# Altium PCB Backplane.PcbDoc (part 1 of 3)
Units mil, origin at the board's own origin, x right, y up, seen from the top; angles counter-clockwise.
Board outline 10300 x 6600 mil, 2 copper layers (Top Layer, Bottom Layer), stack 61.756 mil thick; 53 components, 149 nets, 1204 pads, 195 vias.
Unrouted connection lines stored in the file: 4.
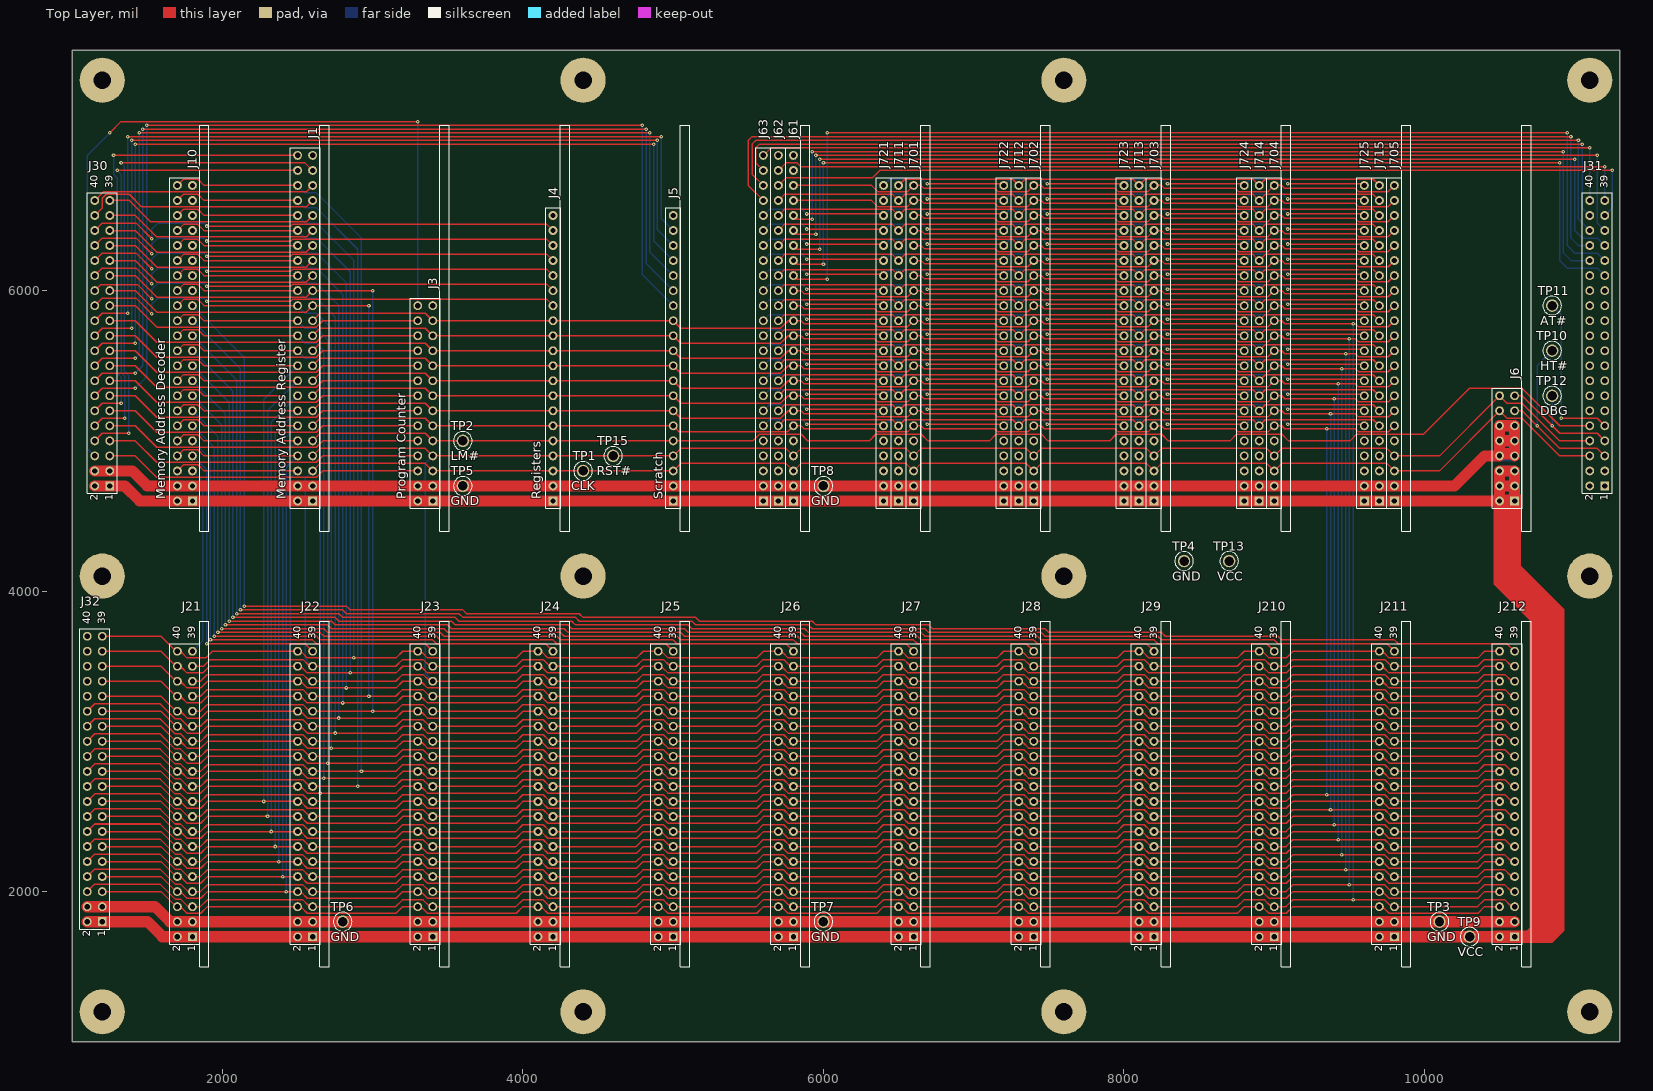
[diagram p0: Top Layer view]
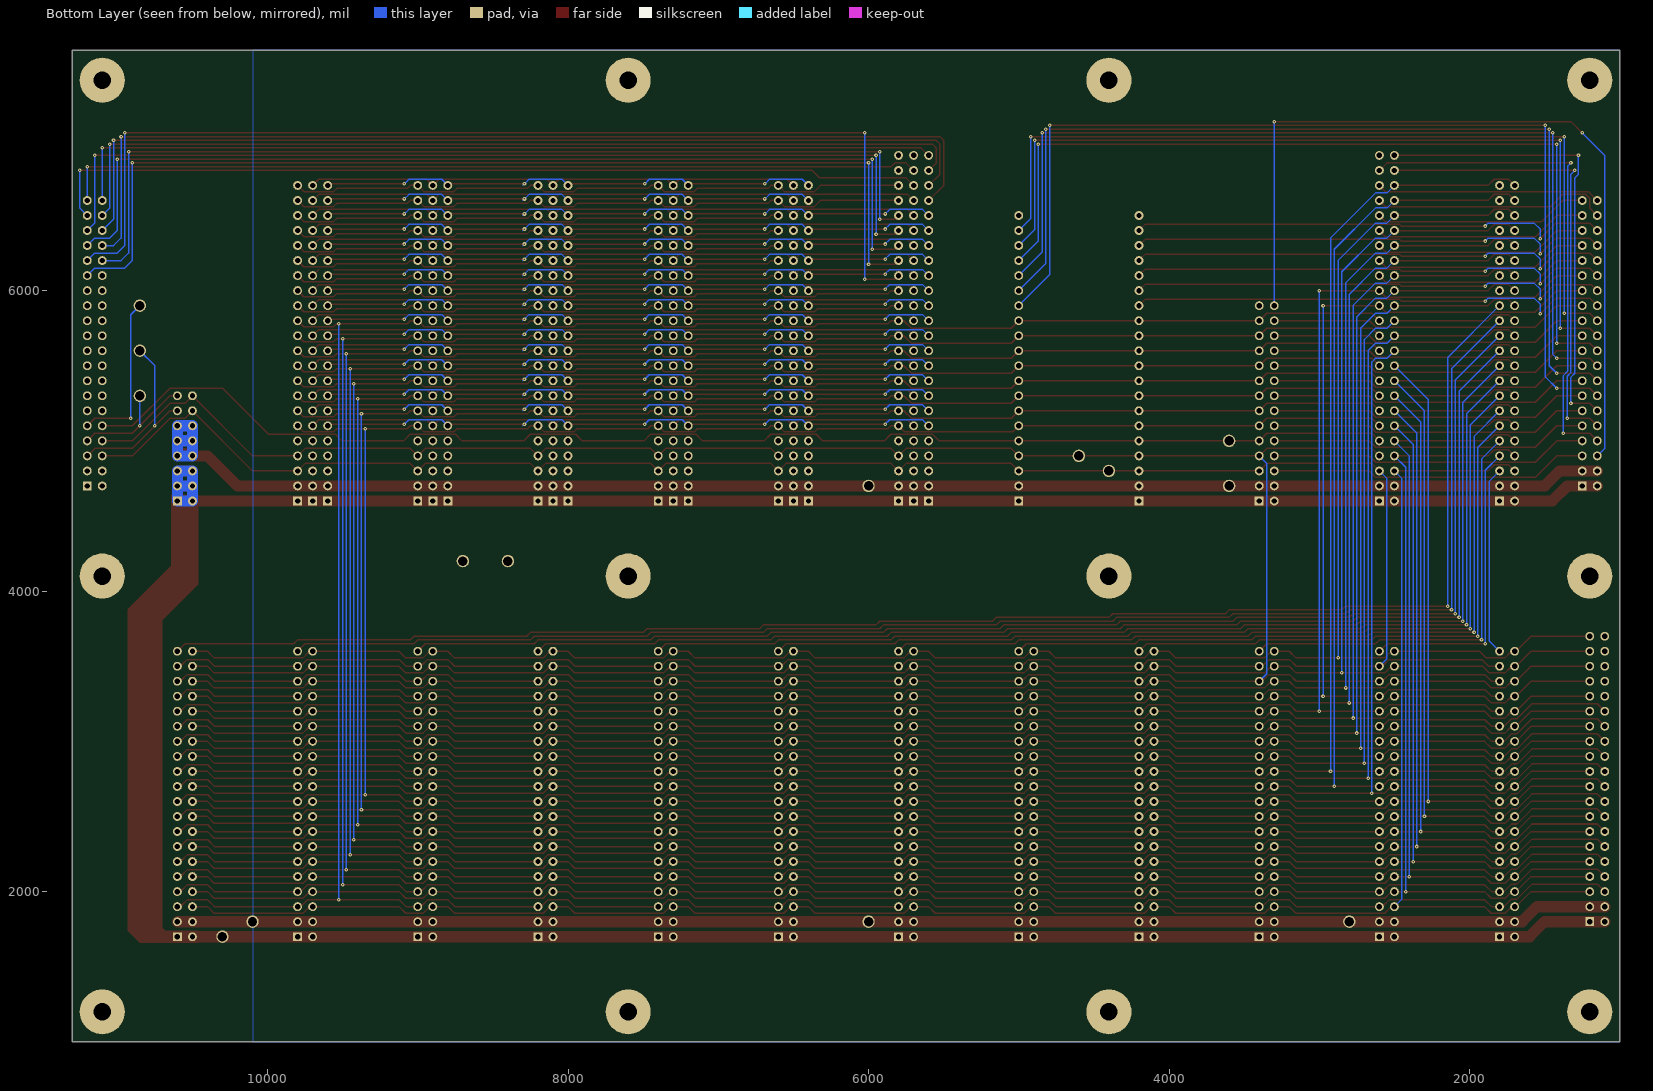
[diagram p1: Bottom Layer view, seen from below]

## Layer stack, top to bottom
Top Solder: solder mask 1, SM-001, Dk 4
Top Layer: signal copper 1.378
Dielectric 1: core 59, Core-043, Dk 4.3
Bottom Layer: signal copper 1.378
Bottom Solder: solder mask 1, SM-001, Dk 4

## Board outline
1000,1000 11300,1000 11300,7600 1000,7600

## Design rules (kind name [scope] priority, off if disabled: settings)
BoardOutlineClearance [All] p1: gap=20 ignorepadtopadclearanceinfootprint=FALSE except(50: Poly-OutlineEdge Poly-CavityEdge Poly-CutoutEdge Poly-SplitBarrior Poly-SplitContinuation)
Clearance Clearance_Poly [InPoly] p1: gap=20 ignorepadtopadclearanceinfootprint=FALSE
Clearance [All] p2: gap=6 ignorepadtopadclearanceinfootprint=FALSE
PolygonConnect [All] p1: connectstyle=Relief reliefconductorwidth=20 reliefentries=4 polygonreliefangle="90 Angle" airgapwidth=20
RoutingVias [All] p1: holewidth=28 width=50 viastyle="Through Hole" minholewidth=10 minwidth=24 maxholewidth=28 maxwidth=50
SolderMaskExpansion [All] p1: expansion=4 istentingtop=FALSE
Width [All] p1: maxlimit=100 minlimit=10 preferedwidth=10
30 further rules are at their usual default settings.

## Classes and differential pairs
component class PWR_CLK: J6
net class ALU_RFU[0..66]: ALU_RFU0 ALU_RFU1 ALU_RFU2 ALU_RFU3 ALU_RFU4 ALU_RFU5 ALU_RFU6 ALU_RFU7 ALU_RFU8 ALU_RFU9 ALU_RFU10 ALU_RFU11 ALU_RFU12 ALU_RFU13 ALU_RFU14 ALU_RFU15 ALU_RFU16 ALU_RFU17 ALU_RFU18 ALU_RFU19 ALU_RFU20 ALU_RFU21 ALU_RFU22 ALU_RFU23 ALU_RFU24 ALU_RFU25 ALU_RFU26 ALU_RFU27 ALU_RFU28 ALU_RFU29 ALU_RFU30 ALU_RFU31 ALU_RFU32 ALU_RFU33 ALU_RFU34 ALU_RFU35 ALU_RFU36 ALU_RFU37 ALU_RFU38 ALU_RFU39 ALU_RFU40 ALU_RFU41 ALU_RFU42 ALU_RFU43 ALU_RFU44 ALU_RFU45 ALU_RFU46 ALU_RFU47 ALU_RFU48 ALU_RFU49 ALU_RFU50 ALU_RFU51 ALU_RFU52 ALU_RFU53 ALU_RFU54 ALU_RFU55 ALU_RFU56 ALU_RFU57 ALU_RFU58 ALU_RFU59 ALU_RFU60 ALU_RFU61 ALU_RFU62 ALU_RFU63 ALU_RFU64 ALU_RFU65 ALU_RFU66
component class ALU5: J705 J715 J725
net class Y[0..7]: Y0 Y1 Y2 Y3 Y4 Y5 Y6 Y7
net class X[0..7]: X0 X1 X2 X3 X4 X5 X6 X7
net class M\[1..15]: M\1 M\2 M\3 M\4 M\5 M\6 M\7 M\8 M\9 M\10 M\11 M\12 M\13 M\14 M\15
component class ALU_CTRL: J61 J62 J63
component class Backplane: TP1 TP2 TP3 TP4 TP5 TP6 TP7 TP8 TP9 TP10 TP11 TP12 TP13 TP15
component class CTRL: J30 J31 J32
component class ALU4: J704 J714 J724
net class INST[0..7]: INST0 INST1 INST2 INST3 INST4 INST5 INST6 INST7
net class EN[1..20]: EN1 EN2 EN3 EN4 EN5 EN6 EN7 EN8 EN9 EN10 EN11 EN12 EN13 EN14 EN15 EN16 EN17 EN18 EN19 EN20
net class BUS[0..7]: BUS0 BUS1 BUS2 BUS3 BUS4 BUS5 BUS6 BUS7
net class ALU[0..3]: ALU0 ALU1 ALU2 ALU3
net class ADDR[0..19]: ADDR0 ADDR1 ADDR2 ADDR3 ADDR4 ADDR5 ADDR6 ADDR7 ADDR8 ADDR9 ADDR10 ADDR11 ADDR12 ADDR13 ADDR14 ADDR15 ADDR16 ADDR17 ADDR18 ADDR19
component class SCRATCH: J5
component class REGS: J4
component class M12: J212
channel class Memory: M0 M1 M2 M3 M4 M5 M6 M7 M8 M9 M10 M11
component class M8: J28
component class M7: J27
component class MAR: J10
channel class "ALU Connector": ALU1 ALU2 ALU3 ALU4 ALU5
component class ALU3: J703 J713 J723 P?_ALU3
component class ALU2: J702 J712 J722 P?_ALU2
component class ALU1: J701 J711 J721 P?_ALU1
component class PC: J3
component class M11: J211
component class M10: J210
component class M9: J29
component class M6: J26
component class M5: J25
component class M4: J24
component class M3: J23
component class M2: J22
component class M1: J21

## Components (designator, comment, footprint, x,y, rotation, side; value= is the part's Value field where it differs from the comment)
J1 "Memory Address Register" HDR2X24 2600,4600 r90 top
J3 "Program Counter" HDR2X14 3400,4600 r90 top
J4 "Registers" HDR1X20 4200,4600 r90 top
J5 "Scratch" HDR1X20 5000,4600 r90 top
J6 "Header 8X2" HDR2X8 10600,4600 r90 top
J10 "Memory Address Decoder" HDR2X22 1800,4600 r90 top
J21 "Header 20X2" HDR2X20 1800,1700 r90 top (schematic designator J2)
J22 "Header 20X2" HDR2X20 2600,1700 r90 top (schematic designator J2)
J23 "Header 20X2" HDR2X20 3400,1700 r90 top (schematic designator J2)
J24 "Header 20X2" HDR2X20 4200,1700 r90 top (schematic designator J2)
J25 "Header 20X2" HDR2X20 5000,1700 r90 top (schematic designator J2)
J26 "Header 20X2" HDR2X20 5800,1700 r90 top (schematic designator J2)
J27 "Header 20X2" HDR2X20 6600,1700 r90 top (schematic designator J2)
J28 "Header 20X2" HDR2X20 7400,1700 r90 top (schematic designator J2)
J29 "Header 20X2" HDR2X20 8200,1700 r90 top (schematic designator J2)
J30 "Header 20X2" HDR2X20 1250,4700 r90 top
J31 "Header 20X2" HDR2X20 11200,4700 r90 top
J32 "Header 20X2" HDR2X20 1200,1800 r90 top
J61 "Header 24" HDR1X24 5800,4600 r90 top
J62 "Header 24" HDR1X24 5700,4600 r90 top
J63 "Header 24" HDR1X24 5600,4600 r90 top
J210 "Header 20X2" HDR2X20 9000,1700 r90 top (schematic designator J2)
J211 "Header 20X2" HDR2X20 9800,1700 r90 top (schematic designator J2)
J212 "Header 20X2" HDR2X20 10600,1700 r90 top (schematic designator J2)
J701 "Header 22" HDR1X22 6600,4600 r90 top (schematic designator J70)
J702 "Header 22" HDR1X22 7400,4600 r90 top (schematic designator J70)
J703 "Header 22" HDR1X22 8200,4600 r90 top (schematic designator J70)
J704 "Header 22" HDR1X22 9000,4600 r90 top locked (schematic designator J70)
J705 "Header 22" HDR1X22 9800,4600 r90 top (schematic designator J70)
J711 "Header 22" HDR1X22 6500,4600 r90 top (schematic designator J71)
J712 "Header 22" HDR1X22 7300,4600 r90 top (schematic designator J71)
J713 "Header 22" HDR1X22 8100,4600 r90 top (schematic designator J71)
J714 "Header 22" HDR1X22 8900,4600 r90 top locked (schematic designator J71)
J715 "Header 22" HDR1X22 9700,4600 r90 top (schematic designator J71)
J721 "Header 22" HDR1X22 6400,4600 r90 top (schematic designator J72)
J722 "Header 22" HDR1X22 7200,4600 r90 top (schematic designator J72)
J723 "Header 22" HDR1X22 8000,4600 r90 top (schematic designator J72)
J724 "Header 22" HDR1X22 8800,4600 r90 top locked (schematic designator J72)
J725 "Header 22" HDR1X22 9600,4600 r90 top (schematic designator J72)
TP1 "CLK" KSTN-5011_V 4400,4800 r0 top
TP2 "LM#" KSTN-5011_V 3600,5000 r0 top
TP3 "GND" KSTN-5011_V 10100,1800 r0 top
TP4 "GND" KSTN-5011_V 8400,4200 r0 top
TP5 "GND" KSTN-5011_V 3600,4700 r0 top
TP6 "GND" KSTN-5011_V 2800,1800 r0 top
TP7 "GND" KSTN-5011_V 6000,1800 r0 top
TP8 "GND" KSTN-5011_V 6000,4700 r0 top
TP9 "VCC" KSTN-5011_V 10300,1700 r0 top
TP10 "HT#" KSTN-5011_V 10850,5600 r0 top
TP11 "AT#" KSTN-5011_V 10850,5900 r0 top
TP12 "DBG" KSTN-5011_V 10850,5300 r0 top
TP13 "VCC" KSTN-5011_V 8700,4200 r0 top
TP15 "RST#" KSTN-5011_V 4600,4900 r0 top

## Footprints (in the part's own frame and the unit in brackets; to place one, negate y for a bottom-side part, rotate by r counter-clockwise, add the part's x,y. Pads: shape width x height; smd on the part's side, far side on the other; paste and mask are expansions set on the pad)
HDR1X20 [mm] "Connector; Header; 20 Position"
  rect 1.5x1.5 hole 0.9: 1(0,0)
  round 1.5 hole 0.9: 2(2.54,0) 3(5.08,0) 4(7.62,0) 5(10.16,0) 6(12.7,0) 7(15.24,0) 8(17.78,0) 9(20.32,0) 10(22.86,0) 11(25.4,0) 12(27.94,0) 13(30.48,0) 14(33.02,0) 15(35.56,0) 16(38.1,0) 17(40.64,0) 18(43.18,0) 19(45.72,0) 20(48.26,0)
  silkscreen extent -1.27,-1.27 49.53,1.27
HDR1X22 [mm] "Connector; Header; 22 Position"
  rect 1.5x1.5 hole 0.9: 1(0,0)
  round 1.5 hole 0.9: 2(2.54,0) 3(5.08,0) 4(7.62,0) 5(10.16,0) 6(12.7,0) 7(15.24,0) 8(17.78,0) 9(20.32,0) 10(22.86,0) 11(25.4,0) 12(27.94,0) 13(30.48,0) 14(33.02,0) 15(35.56,0) 16(38.1,0) 17(40.64,0) 18(43.18,0) 19(45.72,0) 20(48.26,0) 21(50.8,0) 22(53.34,0)
  silkscreen extent -1.27,-1.27 54.61,1.27
HDR1X24 [mm] "Connector; Header; 24 Position"
  rect 1.5x1.5 hole 0.9: 1(0,0)
  round 1.5 hole 0.9: 2(2.54,0) 3(5.08,0) 4(7.62,0) 5(10.16,0) 6(12.7,0) 7(15.24,0) 8(17.78,0) 9(20.32,0) 10(22.86,0) 11(25.4,0) 12(27.94,0) 13(30.48,0) 14(33.02,0) 15(35.56,0) 16(38.1,0) 17(40.64,0) 18(43.18,0) 19(45.72,0) 20(48.26,0) 21(50.8,0) 22(53.34,0) 23(55.88,0) 24(58.42,0)
  silkscreen extent -1.27,-1.27 59.69,1.27
HDR2X8 [mm] "Connector; Header; 8x2 Position"
  rect 1.5x1.5 hole 0.9: 1(0,0)
  round 1.5 hole 0.9: 2(0,2.54) 3(2.54,0) 4(2.54,2.54) 5(5.08,0) 6(5.08,2.54) 7(7.62,0) 8(7.62,2.54) 9(10.16,0) 10(10.16,2.54) 11(12.7,0) 12(12.7,2.54) 13(15.24,0) 14(15.24,2.54) 15(17.78,0) 16(17.78,2.54)
  silkscreen extent -1.27,-1.27 19.05,3.81
HDR2X14 [mm] "Connector; Header; 14x2 Position"
  rect 1.5x1.5 hole 0.9: 1(0,0)
  round 1.5 hole 0.9: 2(0,2.54) 3(2.54,0) 4(2.54,2.54) 5(5.08,0) 6(5.08,2.54) 7(7.62,0) 8(7.62,2.54) 9(10.16,0) 10(10.16,2.54) 11(12.7,0) 12(12.7,2.54) 13(15.24,0) 14(15.24,2.54) 15(17.78,0) 16(17.78,2.54) 17(20.32,0) 18(20.32,2.54) 19(22.86,0) 20(22.86,2.54) 21(25.4,0) 22(25.4,2.54) 23(27.94,0) 24(27.94,2.54) 25(30.48,0) 26(30.48,2.54) 27(33.02,0) 28(33.02,2.54)
  silkscreen extent -1.27,-1.27 34.29,3.81
HDR2X20 [mm] "Connector; Header; 20x2 Position"
  rect 1.5x1.5 hole 0.9: 1(0,0)
  round 1.5 hole 0.9: 2(0,2.54) 3(2.54,0) 4(2.54,2.54) 5(5.08,0) 6(5.08,2.54) 7(7.62,0) 8(7.62,2.54) 9(10.16,0) 10(10.16,2.54) 11(12.7,0) 12(12.7,2.54) 13(15.24,0) 14(15.24,2.54) 15(17.78,0) 16(17.78,2.54) 17(20.32,0) 18(20.32,2.54) 19(22.86,0) 20(22.86,2.54) 21(25.4,0) 22(25.4,2.54) 23(27.94,0) 24(27.94,2.54) 25(30.48,0) 26(30.48,2.54) 27(33.02,0) 28(33.02,2.54) 29(35.56,0) 30(35.56,2.54) 31(38.1,0) 32(38.1,2.54) 33(40.64,0) 34(40.64,2.54) 35(43.18,0) 36(43.18,2.54) 37(45.72,0) 38(45.72,2.54) 39(48.26,0) 40(48.26,2.54)
  silkscreen extent -1.27,-1.27 49.53,3.81
HDR2X22 [mm] "Connector; Header; 22x2 Position"
  rect 1.5x1.5 hole 0.9: 1(0,0)
  round 1.5 hole 0.9: 2(0,2.54) 3(2.54,0) 4(2.54,2.54) 5(5.08,0) 6(5.08,2.54) 7(7.62,0) 8(7.62,2.54) 9(10.16,0) 10(10.16,2.54) 11(12.7,0) 12(12.7,2.54) 13(15.24,0) 14(15.24,2.54) 15(17.78,0) 16(17.78,2.54) 17(20.32,0) 18(20.32,2.54) 19(22.86,0) 20(22.86,2.54) 21(25.4,0) 22(25.4,2.54) 23(27.94,0) 24(27.94,2.54) 25(30.48,0) 26(30.48,2.54) 27(33.02,0) 28(33.02,2.54) 29(35.56,0) 30(35.56,2.54) 31(38.1,0) 32(38.1,2.54) 33(40.64,0) 34(40.64,2.54) 35(43.18,0) 36(43.18,2.54) 37(45.72,0) 38(45.72,2.54) 39(48.26,0) 40(48.26,2.54) 41(50.8,0) 42(50.8,2.54) 43(53.34,0) 44(53.34,2.54)
  silkscreen extent -1.27,-1.27 54.61,3.81
HDR2X24 [mm] "Connector; Header; 24x2 Position"
  rect 1.5x1.5 hole 0.9: 1(0,0)
  round 1.5 hole 0.9: 2(0,2.54) 3(2.54,0) 4(2.54,2.54) 5(5.08,0) 6(5.08,2.54) 7(7.62,0) 8(7.62,2.54) 9(10.16,0) 10(10.16,2.54) 11(12.7,0) 12(12.7,2.54) 13(15.24,0) 14(15.24,2.54) 15(17.78,0) 16(17.78,2.54) 17(20.32,0) 18(20.32,2.54) 19(22.86,0) 20(22.86,2.54) 21(25.4,0) 22(25.4,2.54) 23(27.94,0) 24(27.94,2.54) 25(30.48,0) 26(30.48,2.54) 27(33.02,0) 28(33.02,2.54) 29(35.56,0) 30(35.56,2.54) 31(38.1,0) 32(38.1,2.54) 33(40.64,0) 34(40.64,2.54) 35(43.18,0) 36(43.18,2.54) 37(45.72,0) 38(45.72,2.54) 39(48.26,0) 40(48.26,2.54) 41(50.8,0) 42(50.8,2.54) 43(53.34,0) 44(53.34,2.54) 45(55.88,0) 46(55.88,2.54) 47(58.42,0) 48(58.42,2.54)
  silkscreen extent -1.27,-1.27 59.69,3.81
KSTN-5011_V [mm] "Test Point, Dia 3.17mm"
  round 2.1 hole 1.6: 1(0,0)
  silkscreen extent -1.59,-1.58 1.59,1.58, body extent -1.59,-1.59 1.59,1.59, height 8.13

## Part data
J1: library part "Header 24x2", "Header, 24-Pin, Dual row", LatestRevisionDate=17-Jul-2002, LatestRevisionNote="Re-released for DXP Platform.", Publisher="Altium Limited", System=Connector
J3: library part "Header 14X2", "Header, 14-Pin, Dual row", LatestRevisionDate=17-Jul-2002, LatestRevisionNote="Re-released for DXP Platform.", Publisher="Altium Limited", System=Connector
J4 J5: library part "Header 20", "Header, 20-Pin", LatestRevisionDate=17-Jul-2002, LatestRevisionNote="Re-released for DXP Platform.", Publisher="Altium Limited", System=Connector
J6: "Header, 8-Pin, Dual row", LatestRevisionDate=17-Jul-2002, LatestRevisionNote="Re-released for DXP Platform.", Publisher="Altium Limited", System=Connector
J10: library part "Header 22X2", "Header, 22-Pin, Dual row", LatestRevisionDate=17-Jul-2002, LatestRevisionNote="Re-released for DXP Platform.", Publisher="Altium Limited", System=Connector
J21 J22 J23 J24 J25 J26 J27 J28 J29 J30 J31 J32 J210 J211 J212: "Header, 20-Pin, Dual row", LatestRevisionDate=17-Jul-2002, LatestRevisionNote="Re-released for DXP Platform.", Publisher="Altium Limited", System=Connector
J61 J62 J63: "Header, 24-Pin", LatestRevisionDate=17-Jul-2002, LatestRevisionNote="Re-released for DXP Platform.", Publisher="Altium Limited", System=Connector
J701 J702 J703 J704 J705 J711 J712 J713 J714 J715 J721 J722 J723 J724 J725: "Header, 22-Pin", LatestRevisionDate=17-Jul-2002, LatestRevisionNote="Re-released for DXP Platform.", Publisher="Altium Limited", System=Connector
TP1 TP2 TP3 TP4 TP5 TP6 TP7 TP8 TP9 TP10 TP11 TP12 TP13 TP15: library part TP

## Free pads (board coordinates)
  round 300 hole 116: 11(1200,1200) 11(1200,4100) 11(1200,7400) 11(4400,1200) 11(4400,4100) 11(4400,7400) 11(7600,1200) 11(7600,4100) 11(7600,7400) 11(11100,1200) 11(11100,4100) 11(11100,7400)

## Via types
v1: diameter 24, hole 10, Top Layer to Bottom Layer, tented both sides, 195 vias

## Nets (pads, with @x,y where several pads share a name; then routed paths per layer and width w, separated by ;. In a path a pad name is that pad's centre, name@x,y a point inside that pad or via, vN(x,y) a via of type N, cw(c..) or ccw(c..) an arc to the next point about the centre after c; other vN are vias at no path point)
ADDR0: J1.6 J10.6 J21.6 J22.6 J23.6 J24.6 J25.6 J26.6 J27.6 J28.6 J29.6 J32.5 J210.6 J211.6 J212.6 | length 13522.6
  Top Layer w10: J32.5@1200,2000 1590,2000 1690,1900 J21.6@1700,1900 1709.39,1890.61 1729.39,1890.61 1764.53,1855.47 1855.47,1855.47 1900,1900 J22.6@2500,1900 2509.39,1890.61 2529.39,1890.61 2564.53,1855.47 3155.47,1855.47 3200,1900 J23.6@3300,1900 3309.39,1890.61 3329.39,1890.61 3364.53,1855.47 3955.47,1855.47 4000,1900 J24.6@4100,1900 4109.39,1890.61 4129.39,1890.61 4164.53,1855.47 4755.47,1855.47 4800,1900 J25.6@4900,1900 4909.39,1890.61 4929.39,1890.61 4964.53,1855.47 5555.47,1855.47 5600,1900 J26.6@5700,1900 5709.39,1890.61 5729.39,1890.61 5764.53,1855.47 6355.47,1855.47 6400,1900 J27.6@6500,1900 6509.39,1890.61 6529.39,1890.61 6564.53,1855.47 7155.47,1855.47 7200,1900 J28.6@7300,1900 7309.39,1890.61 7329.39,1890.61 7364.53,1855.47 7955.47,1855.47 8000,1900 J29.6@8100,1900 8109.39,1890.61 8129.39,1890.61 8164.53,1855.47 8755.47,1855.47 8800,1900 J210.6@8900,1900 8909.39,1890.61 8929.39,1890.61 8964.53,1855.47 9080.47,1855.47 9125,1900 J211.6@9700,1900 9709.39,1890.61 9729.39,1890.61 9764.53,1855.47 10355.47,1855.47 10400,1900 J212.6@10500,1900 ; J10.6@1700,4800 1741,4841 1836,4841 1877,4800 J1.6@2500,4800
  Bottom Layer w10: J22.6@2500,1900 2450,1950 2450,4750 J1.6@2500,4800
ADDR1: J1.8 J10.8 J21.8 J22.8 J23.8 J24.8 J25.8 J26.8 J27.8 J28.8 J29.8 J32.7 J210.8 J211.8 J212.8 | length 13510.3
  Top Layer w10: J32.7@1200,2100 1590,2100 1690,2000 J21.8@1700,2000 1709.39,1990.61 1729.39,1990.61 1764.53,1955.47 1855.47,1955.47 1900,2000 v1(2425,2000) J22.8@2500,2000 2509.39,1990.61 2529.39,1990.61 2564.53,1955.47 3155.47,1955.47 3200,2000 J23.8@3300,2000 3309.39,1990.61 3329.39,1990.61 3364.53,1955.47 3955.47,1955.47 4000,2000 J24.8@4100,2000 4109.39,1990.61 4129.39,1990.61 4164.53,1955.47 4755.47,1955.47 4800,2000 J25.8@4900,2000 4909.39,1990.61 4929.39,1990.61 4964.53,1955.47 5555.47,1955.47 5600,2000 J26.8@5700,2000 5709.39,1990.61 5729.39,1990.61 5764.53,1955.47 6355.47,1955.47 6400,2000 J27.8@6500,2000 6509.39,1990.61 6529.39,1990.61 6564.53,1955.47 7155.47,1955.47 7200,2000 J28.8@7300,2000 7309.39,1990.61 7329.39,1990.61 7364.53,1955.47 7955.47,1955.47 8000,2000 J29.8@8100,2000 8109.39,1990.61 8129.39,1990.61 8164.53,1955.47 8755.47,1955.47 8800,2000 J210.8@8900,2000 8909.39,1990.61 8929.39,1990.61 8964.53,1955.47 9080.47,1955.47 9125,2000 J211.8@9700,2000 9709.39,1990.61 9729.39,1990.61 9764.53,1955.47 10353.6,1955.47 ; J10.8@1700,4900 1741,4941 1836,4941 1877,4900 J1.8@2500,4900 ; 10355.47,1955.47 10400,2000 J212.8@10500,2000
  Bottom Layer w10: v1(2425,2000) 2425,4825 J1.8@2500,4900
ADDR2: J1.10 J10.10 J21.10 J22.10 J23.10 J24.10 J25.10 J26.10 J27.10 J28.10 J29.10 J32.9 J210.10 J211.10 J212.10 | length 13520.7
  Top Layer w10: J32.9@1200,2200 1590,2200 1690,2100 J21.10@1700,2100 1709.39,2090.61 1729.39,2090.61 1764.53,2055.47 1855.47,2055.47 1900,2100 v1(2400,2100) J22.10@2500,2100 2509.39,2090.61 2529.39,2090.61 2564.53,2055.47 3155.47,2055.47 3200,2100 J23.10@3300,2100 3309.39,2090.61 3329.39,2090.61 3364.53,2055.47 3955.47,2055.47 4000,2100 J24.10@4100,2100 4109.39,2090.61 4129.39,2090.61 4164.53,2055.47 4755.47,2055.47 4800,2100 J25.10@4900,2100 4909.39,2090.61 4929.39,2090.61 4964.53,2055.47 5555.47,2055.47 5600,2100 J26.10@5700,2100 5709.39,2090.61 5729.39,2090.61 5764.53,2055.47 6355.47,2055.47 6400,2100 J27.10@6500,2100 6509.39,2090.61 6529.39,2090.61 6564.53,2055.47 7155.47,2055.47 7200,2100 J28.10@7300,2100 7309.39,2090.61 7329.39,2090.61 7364.53,2055.47 7955.47,2055.47 8000,2100 J29.10@8100,2100 8109.39,2090.61 8129.39,2090.61 8164.53,2055.47 8755.47,2055.47 8800,2100 J210.10@8900,2100 8909.39,2090.61 8929.39,2090.61 8964.53,2055.47 9080.47,2055.47 9125,2100 J211.10@9700,2100 9709.39,2090.61 9729.39,2090.61 9764.53,2055.47 10353.6,2055.47 ; J10.10@1700,5000 1741,5041 1836,5041 1877,5000 J1.10@2500,5000 ; 10355.47,2055.47 10400,2100 J212.10@10500,2100
  Bottom Layer w10: v1(2400,2100) 2400,4900 J1.10@2500,5000
ADDR3: J1.12 J10.12 J21.12 J22.12 J23.12 J24.12 J25.12 J26.12 J27.12 J28.12 J29.12 J32.11 J210.12 J211.12 J212.12 | length 13531.1
  Top Layer w10: J32.11@1200,2300 1590,2300 1690,2200 J21.12@1700,2200 1709.39,2190.61 1729.39,2190.61 1764.53,2155.47 1855.47,2155.47 1900,2200 v1(2375,2200) J22.12@2500,2200 2509.39,2190.61 2529.39,2190.61 2564.53,2155.47 3155.47,2155.47 3200,2200 J23.12@3300,2200 3309.39,2190.61 3329.39,2190.61 3364.53,2155.47 3955.47,2155.47 4000,2200 J24.12@4100,2200 4109.39,2190.61 4129.39,2190.61 4164.53,2155.47 4755.47,2155.47 4800,2200 J25.12@4900,2200 4909.39,2190.61 4929.39,2190.61 4964.53,2155.47 5555.47,2155.47 5600,2200 J26.12@5700,2200 5709.39,2190.61 5729.39,2190.61 5764.53,2155.47 6355.47,2155.47 6400,2200 J27.12@6500,2200 6509.39,2190.61 6529.39,2190.61 6564.53,2155.47 7155.47,2155.47 7200,2200 J28.12@7300,2200 7309.39,2190.61 7329.39,2190.61 7364.53,2155.47 7955.47,2155.47 8000,2200 J29.12@8100,2200 8109.39,2190.61 8129.39,2190.61 8164.53,2155.47 8755.47,2155.47 8800,2200 J210.12@8900,2200 8909.39,2190.61 8929.39,2190.61 8964.53,2155.47 9080.47,2155.47 9125,2200 J211.12@9700,2200 9709.39,2190.61 9729.39,2190.61 9764.53,2155.47 10353.6,2155.47 ; J10.12@1700,5100 1741,5141 1836,5141 1877,5100 J1.12@2500,5100 ; 10355.47,2155.47 10400,2200 J212.12@10500,2200
  Bottom Layer w10: v1(2375,2200) 2375,4975 J1.12@2500,5100
ADDR4: J1.14 J10.14 J21.14 J22.14 J23.14 J24.14 J25.14 J26.14 J27.14 J28.14 J29.14 J32.13 J210.14 J211.14 J212.14 | length 13541.4
  Top Layer w10: J32.13@1200,2400 1590,2400 1690,2300 J21.14@1700,2300 1709.39,2290.61 1729.39,2290.61 1764.53,2255.47 1855.47,2255.47 1900,2300 v1(2350,2300) J22.14@2500,2300 2509.39,2290.61 2529.39,2290.61 2564.53,2255.47 3155.47,2255.47 3200,2300 J23.14@3300,2300 3309.39,2290.61 3329.39,2290.61 3364.53,2255.47 3955.47,2255.47 4000,2300 J24.14@4100,2300 4109.39,2290.61 4129.39,2290.61 4164.53,2255.47 4755.47,2255.47 4800,2300 J25.14@4900,2300 4909.39,2290.61 4929.39,2290.61 4964.53,2255.47 5555.47,2255.47 5600,2300 J26.14@5700,2300 5709.39,2290.61 5729.39,2290.61 5764.53,2255.47 6355.47,2255.47 6400,2300 J27.14@6500,2300 6509.39,2290.61 6529.39,2290.61 6564.53,2255.47 7155.47,2255.47 7200,2300 J28.14@7300,2300 7309.39,2290.61 7329.39,2290.61 7364.53,2255.47 7955.47,2255.47 8000,2300 J29.14@8100,2300 8109.39,2290.61 8129.39,2290.61 8164.53,2255.47 8755.47,2255.47 8800,2300 J210.14@8900,2300 8909.39,2290.61 8929.39,2290.61 8964.53,2255.47 9080.47,2255.47 9125,2300 J211.14@9700,2300 9709.39,2290.61 9729.39,2290.61 9764.53,2255.47 10353.6,2255.47 ; J10.14@1700,5200 1741,5241 1836,5241 1877,5200 J1.14@2500,5200 ; 10355.47,2255.47 10400,2300 J212.14@10500,2300
  Bottom Layer w10: v1(2350,2300) 2350,5050 J1.14@2500,5200
ADDR5: J1.16 J10.16 J21.16 J22.16 J23.16 J24.16 J25.16 J26.16 J27.16 J28.16 J29.16 J32.15 J210.16 J211.16 J212.16 | length 13451.8
  Top Layer w10: J32.15@1200,2500 1590,2500 1690,2400 J21.16@1700,2400 1709.39,2390.61 1729.39,2390.61 1764.53,2355.47 1855.47,2355.47 1900,2400 v1(2325,2400) J22.16@2500,2400 2509.39,2390.61 2529.39,2390.61 2564.53,2355.47 3155.47,2355.47 3200,2400 J23.16@3300,2400 3309.39,2390.61 3329.39,2390.61 3364.53,2355.47 3955.47,2355.47 4000,2400 J24.16@4100,2400 4109.39,2390.61 4129.39,2390.61 4164.53,2355.47 4755.47,2355.47 4800,2400 J25.16@4900,2400 4909.39,2390.61 4929.39,2390.61 4964.53,2355.47 5555.47,2355.47 5600,2400 J26.16@5700,2400 5709.39,2390.61 5729.39,2390.61 5764.53,2355.47 6355.47,2355.47 6400,2400 J27.16@6500,2400 6509.39,2390.61 6529.39,2390.61 6564.53,2355.47 7155.47,2355.47 7200,2400 J28.16@7300,2400 7309.39,2390.61 7329.39,2390.61 7364.53,2355.47 7955.47,2355.47 8000,2400 J29.16@8100,2400 8109.39,2390.61 8129.39,2390.61 8164.53,2355.47 8755.47,2355.47 8800,2400 J210.16@8900,2400 8909.39,2390.61 8929.39,2390.61 8964.53,2355.47 9080.47,2355.47 9125,2400 J211.16@9700,2400 9709.39,2390.61 9729.39,2390.61 9764.53,2355.47 10353.6,2355.47 ; J10.16@1700,5300 1741,5341 1836,5341 1877,5300 2400,5300 ; 10355.47,2355.47 10400,2400 J212.16@10500,2400
  Bottom Layer w10: v1(2325,2400) 2325,5125 J1.16@2500,5300
ADDR6: J1.18 J10.18 J21.18 J22.18 J23.18 J24.18 J25.18 J26.18 J27.18 J28.18 J29.18 J32.17 J210.18 J211.18 J212.18 | length 13559.8
  Top Layer w10: J32.17@1200,2600 1590,2600 1690,2500 J21.18@1700,2500 1709.39,2490.61 1729.39,2490.61 1764.53,2455.47 1855.47,2455.47 1900,2500 2300.07,2500 J22.18@2500,2500 2509.39,2490.61 2529.39,2490.61 2564.53,2455.47 3155.47,2455.47 3200,2500 J23.18@3300,2500 3309.39,2490.61 3329.39,2490.61 3364.53,2455.47 3955.47,2455.47 4000,2500 J24.18@4100,2500 4109.39,2490.61 4129.39,2490.61 4164.53,2455.47 4755.47,2455.47 4800,2500 J25.18@4900,2500 4909.39,2490.61 4929.39,2490.61 4964.53,2455.47 5555.47,2455.47 5600,2500 J26.18@5700,2500 5709.39,2490.61 5729.39,2490.61 5764.53,2455.47 6355.47,2455.47 6400,2500 J27.18@6500,2500 6509.39,2490.61 6529.39,2490.61 6564.53,2455.47 7155.47,2455.47 7200,2500 J28.18@7300,2500 7309.39,2490.61 7329.39,2490.61 7364.53,2455.47 7955.47,2455.47 8000,2500 J29.18@8100,2500 8109.39,2490.61 8129.39,2490.61 8164.53,2455.47 8755.47,2455.47 8800,2500 J210.18@8900,2500 8909.39,2490.61 8929.39,2490.61 8964.53,2455.47 9080.47,2455.47 9125,2500 J211.18@9700,2500 9709.39,2490.61 9729.39,2490.61 9764.53,2455.47 10353.6,2455.47 ; J10.18@1700,5400 1741,5441 1836,5441 1877,5400 J1.18@2500,5400 ; 10355.47,2455.47 10400,2500 J212.18@10500,2500
  Bottom Layer w10: v1(2300.07,2502.28) 2300.07,5200.07 J1.18@2500,5400
ADDR7: J1.20 J10.20 J21.20 J22.20 J23.20 J24.20 J25.20 J26.20 J27.20 J28.20 J29.20 J32.19 J210.20 J211.20 J212.20 | length 13572.5
  Top Layer w10: J32.19@1200,2700 1590,2700 1690,2600 J21.20@1700,2600 1709.39,2590.61 1729.39,2590.61 1764.53,2555.47 1855.47,2555.47 1900,2600 v1(2275,2600) J22.20@2500,2600 2509.39,2590.61 2529.39,2590.61 2564.53,2555.47 3155.47,2555.47 3200,2600 J23.20@3300,2600 3309.39,2590.61 3329.39,2590.61 3364.53,2555.47 3955.47,2555.47 4000,2600 J24.20@4100,2600 4109.39,2590.61 4129.39,2590.61 4164.53,2555.47 4755.47,2555.47 4800,2600 J25.20@4900,2600 4909.39,2590.61 4929.39,2590.61 4964.53,2555.47 5555.47,2555.47 5600,2600 J26.20@5700,2600 5709.39,2590.61 5729.39,2590.61 5764.53,2555.47 6355.47,2555.47 6400,2600 J27.20@6500,2600 6509.39,2590.61 6529.39,2590.61 6564.53,2555.47 7155.47,2555.47 7200,2600 J28.20@7300,2600 7309.39,2590.61 7329.39,2590.61 7364.53,2555.47 7955.47,2555.47 8000,2600 J29.20@8100,2600 8109.39,2590.61 8129.39,2590.61 8164.53,2555.47 8755.47,2555.47 8800,2600 J210.20@8900,2600 8909.39,2590.61 8929.39,2590.61 8964.53,2555.47 9080.47,2555.47 9125,2600 J211.20@9700,2600 9709.39,2590.61 9729.39,2590.61 9764.53,2555.47 10353.6,2555.47 ; J10.20@1700,5500 1741,5541 1836,5541 1877,5500 J1.20@2500,5500 ; 10355.47,2555.47 10400,2600 J212.20@10500,2600
  Bottom Layer w10: v1(2275,2600) 2275,5275 J1.20@2500,5500
ADDR8: J1.22 J10.22 J21.22 J22.22 J23.22 J24.22 J25.22 J26.22 J27.22 J28.22 J29.22 J32.21 J210.22 J211.22 J212.22 | length 13629.9
  Top Layer w10: J32.21@1200,2800 1590,2800 1690,2700 J21.22@1700,2700 1709.39,2690.61 1729.39,2690.61 1764.53,2655.47 1855.47,2655.47 1900,2700 J22.22@2500,2700 2509.39,2690.61 2529.39,2690.61 2564.53,2655.47 3155.47,2655.47 3200,2700 J23.22@3300,2700 3309.39,2690.61 3329.39,2690.61 3364.53,2655.47 3955.47,2655.47 4000,2700 J24.22@4100,2700 4109.39,2690.61 4129.39,2690.61 4164.53,2655.47 4755.47,2655.47 4800,2700 J25.22@4900,2700 4909.39,2690.61 4929.39,2690.61 4964.53,2655.47 5555.47,2655.47 5600,2700 J26.22@5700,2700 5709.39,2690.61 5729.39,2690.61 5764.53,2655.47 6355.47,2655.47 6400,2700 J27.22@6500,2700 6509.39,2690.61 6529.39,2690.61 6564.53,2655.47 7155.47,2655.47 7200,2700 J28.22@7300,2700 7309.39,2690.61 7329.39,2690.61 7364.53,2655.47 7955.47,2655.47 8000,2700 J29.22@8100,2700 8109.39,2690.61 8129.39,2690.61 8164.53,2655.47 8755.47,2655.47 8800,2700 J210.22@8900,2700 8909.39,2690.61 8929.39,2690.61 8964.53,2655.47 9080.47,2655.47 9125,2700 J211.22@9700,2700 9709.39,2690.61 9729.39,2690.61 9764.53,2655.47 10353.6,2655.47 ; J10.22@1700,5600 1741,5641 1836,5641 1877,5600 J1.22@2500,5600 ; 10355.47,2655.47 10400,2700 J212.22@10500,2700
  Bottom Layer w10: J1.22@2500,5600 2550,5550 2625,5550 2650,5525 v1(2650,2655.47)
ADDR9: J1.24 J10.24 J21.24 J22.24 J23.24 J24.24 J25.24 J26.24 J27.24 J28.24 J29.24 J32.23 J210.24 J211.24 J212.24 | length 13640.2
  Top Layer w10: J32.23@1200,2900 1590,2900 1690,2800 J21.24@1700,2800 1709.39,2790.61 1729.39,2790.61 1764.53,2755.47 1855.47,2755.47 1900,2800 J22.24@2500,2800 2509.39,2790.61 2529.39,2790.61 2564.53,2755.47 3155.47,2755.47 3200,2800 J23.24@3300,2800 3309.39,2790.61 3329.39,2790.61 3364.53,2755.47 3955.47,2755.47 4000,2800 J24.24@4100,2800 4109.39,2790.61 4129.39,2790.61 4164.53,2755.47 4755.47,2755.47 4800,2800 J25.24@4900,2800 4909.39,2790.61 4929.39,2790.61 4964.53,2755.47 5555.47,2755.47 5600,2800 J26.24@5700,2800 5709.39,2790.61 5729.39,2790.61 5764.53,2755.47 6355.47,2755.47 6400,2800 J27.24@6500,2800 6509.39,2790.61 6529.39,2790.61 6564.53,2755.47 7155.47,2755.47 7200,2800 J28.24@7300,2800 7309.39,2790.61 7329.39,2790.61 7364.53,2755.47 7955.47,2755.47 8000,2800 J29.24@8100,2800 8109.39,2790.61 8129.39,2790.61 8164.53,2755.47 8755.47,2755.47 8800,2800 J210.24@8900,2800 8909.39,2790.61 8929.39,2790.61 8964.53,2755.47 9080.47,2755.47 9125,2800 J211.24@9700,2800 9709.39,2790.61 9729.39,2790.61 9764.53,2755.47 10353.6,2755.47 ; J10.24@1700,5700 1741,5741 1836,5741 1877,5700 J1.24@2500,5700 ; 10355.47,2755.47 10400,2800 J212.24@10500,2800
  Bottom Layer w10: J1.24@2500,5700 2550,5650 2625,5650 2675,5600 v1(2675,2755.47)
ADDR10: J1.26 J10.26 J21.26 J22.26 J23.26 J24.26 J25.26 J26.26 J27.26 J28.26 J29.26 J32.25 J210.26 J211.26 J212.26 | length 13650.6
  Top Layer w10: J32.25@1200,3000 1590,3000 1690,2900 J21.26@1700,2900 1709.39,2890.61 1729.39,2890.61 1764.53,2855.47 1855.47,2855.47 1900,2900 J22.26@2500,2900 2509.39,2890.61 2529.39,2890.61 2564.53,2855.47 3155.47,2855.47 3200,2900 J23.26@3300,2900 3309.39,2890.61 3329.39,2890.61 3364.53,2855.47 3955.47,2855.47 4000,2900 J24.26@4100,2900 4109.39,2890.61 4129.39,2890.61 4164.53,2855.47 4755.47,2855.47 4800,2900 J25.26@4900,2900 4909.39,2890.61 4929.39,2890.61 4964.53,2855.47 5555.47,2855.47 5600,2900 J26.26@5700,2900 5709.39,2890.61 5729.39,2890.61 5764.53,2855.47 6355.47,2855.47 6400,2900 J27.26@6500,2900 6509.39,2890.61 6529.39,2890.61 6564.53,2855.47 7155.47,2855.47 7200,2900 J28.26@7300,2900 7309.39,2890.61 7329.39,2890.61 7364.53,2855.47 7955.47,2855.47 8000,2900 J29.26@8100,2900 8109.39,2890.61 8129.39,2890.61 8164.53,2855.47 8755.47,2855.47 8800,2900 J210.26@8900,2900 8909.39,2890.61 8929.39,2890.61 8964.53,2855.47 9080.47,2855.47 9125,2900 J211.26@9700,2900 9709.39,2890.61 9729.39,2890.61 9764.53,2855.47 10353.6,2855.47 ; J10.26@1700,5800 1741,5841 1836,5841 1877,5800 J1.26@2500,5800 ; 10355.47,2855.47 10400,2900 J212.26@10500,2900
  Bottom Layer w10: J1.26@2500,5800 2550,5750 2625,5750 2700,5675 v1(2700,2855.47)
ADDR11: J1.28 J10.28 J21.28 J22.28 J23.28 J24.28 J25.28 J26.28 J27.28 J28.28 J29.28 J32.27 J210.28 J211.28 J212.28 | length 13660.9
  Top Layer w10: J32.27@1200,3100 1590,3100 1690,3000 J21.28@1700,3000 1709.39,2990.61 1729.39,2990.61 1764.53,2955.47 1855.47,2955.47 1900,3000 J22.28@2500,3000 2509.39,2990.61 2529.39,2990.61 2564.53,2955.47 3155.47,2955.47 3200,3000 J23.28@3300,3000 3309.39,2990.61 3329.39,2990.61 3364.53,2955.47 3955.47,2955.47 4000,3000 J24.28@4100,3000 4109.39,2990.61 4129.39,2990.61 4164.53,2955.47 4755.47,2955.47 4800,3000 J25.28@4900,3000 4909.39,2990.61 4929.39,2990.61 4964.53,2955.47 5555.47,2955.47 5600,3000 J26.28@5700,3000 5709.39,2990.61 5729.39,2990.61 5764.53,2955.47 6355.47,2955.47 6400,3000 J27.28@6500,3000 6509.39,2990.61 6529.39,2990.61 6564.53,2955.47 7155.47,2955.47 7200,3000 J28.28@7300,3000 7309.39,2990.61 7329.39,2990.61 7364.53,2955.47 7955.47,2955.47 8000,3000 J29.28@8100,3000 8109.39,2990.61 8129.39,2990.61 8164.53,2955.47 8755.47,2955.47 8800,3000 J210.28@8900,3000 8909.39,2990.61 8929.39,2990.61 8964.53,2955.47 9080.47,2955.47 9125,3000 J211.28@9700,3000 9709.39,2990.61 9729.39,2990.61 9764.53,2955.47 10353.6,2955.47 ; J10.28@1700,5900 1741,5941 1836,5941 1877,5900 J1.28@2500,5900 ; 10355.47,2955.47 10400,3000 J212.28@10500,3000
  Bottom Layer w10: J1.28@2500,5900 2550,5850 2625,5850 2725,5750 v1(2725,2955.47)
ADDR12: J1.30 J10.30 J21.30 J22.30 J23.30 J24.30 J25.30 J26.30 J27.30 J28.30 J29.30 J32.29 J210.30 J211.30 J212.30 | length 13671.3
  Top Layer w10: J32.29@1200,3200 1590,3200 1690,3100 J21.30@1700,3100 1709.39,3090.61 1729.39,3090.61 1764.53,3055.47 1855.47,3055.47 1900,3100 J22.30@2500,3100 2509.39,3090.61 2529.39,3090.61 2564.53,3055.47 3155.47,3055.47 3200,3100 J23.30@3300,3100 3309.39,3090.61 3329.39,3090.61 3364.53,3055.47 3955.47,3055.47 4000,3100 J24.30@4100,3100 4109.39,3090.61 4129.39,3090.61 4164.53,3055.47 4755.47,3055.47 4800,3100 J25.30@4900,3100 4909.39,3090.61 4929.39,3090.61 4964.53,3055.47 5555.47,3055.47 5600,3100 J26.30@5700,3100 5709.39,3090.61 5729.39,3090.61 5764.53,3055.47 6355.47,3055.47 6400,3100 J27.30@6500,3100 6509.39,3090.61 6529.39,3090.61 6564.53,3055.47 7155.47,3055.47 7200,3100 J28.30@7300,3100 7309.39,3090.61 7329.39,3090.61 7364.53,3055.47 7955.47,3055.47 8000,3100 J29.30@8100,3100 8109.39,3090.61 8129.39,3090.61 8164.53,3055.47 8755.47,3055.47 8800,3100 J210.30@8900,3100 8909.39,3090.61 8929.39,3090.61 8964.53,3055.47 9080.47,3055.47 9125,3100 J211.30@9700,3100 9709.39,3090.61 9729.39,3090.61 9764.53,3055.47 10353.6,3055.47 ; J10.30@1700,6000 1741,6041 1836,6041 1877,6000 J1.30@2500,6000 ; 10355.47,3055.47 10400,3100 J212.30@10500,3100
  Bottom Layer w10: J1.30@2500,6000 2550,5950 2625,5950 2750,5825 v1(2750,3055.47)
ADDR13: J1.32 J10.32 J21.32 J22.32 J23.32 J24.32 J25.32 J26.32 J27.32 J28.32 J29.32 J32.31 J210.32 J211.32 J212.32 | length 13681.6
  Top Layer w10: J32.31@1200,3300 1590,3300 1690,3200 J21.32@1700,3200 1709.39,3190.61 1729.39,3190.61 1764.53,3155.47 1855.47,3155.47 1900,3200 J22.32@2500,3200 2509.39,3190.61 2529.39,3190.61 2564.53,3155.47 3155.47,3155.47 3200,3200 J23.32@3300,3200 3309.39,3190.61 3329.39,3190.61 3364.53,3155.47 3955.47,3155.47 4000,3200 J24.32@4100,3200 4109.39,3190.61 4129.39,3190.61 4164.53,3155.47 4755.47,3155.47 4800,3200 J25.32@4900,3200 4909.39,3190.61 4929.39,3190.61 4964.53,3155.47 5555.47,3155.47 5600,3200 J26.32@5700,3200 5709.39,3190.61 5729.39,3190.61 5764.53,3155.47 6355.47,3155.47 6400,3200 J27.32@6500,3200 6509.39,3190.61 6529.39,3190.61 6564.53,3155.47 7155.47,3155.47 7200,3200 J28.32@7300,3200 7309.39,3190.61 7329.39,3190.61 7364.53,3155.47 7955.47,3155.47 8000,3200 J29.32@8100,3200 8109.39,3190.61 8129.39,3190.61 8164.53,3155.47 8755.47,3155.47 8800,3200 J210.32@8900,3200 8909.39,3190.61 8929.39,3190.61 8964.53,3155.47 9080.47,3155.47 9125,3200 J211.32@9700,3200 9709.39,3190.61 9729.39,3190.61 9764.53,3155.47 10353.6,3155.47 ; J10.32@1700,6100 1741,6141 1836,6141 1877,6100 J1.32@2500,6100 ; 10355.47,3155.47 10400,3200 J212.32@10500,3200
  Bottom Layer w10: J1.32@2500,6100 2550,6050 2625,6050 2775,5900 v1(2775,3155.47)
ADDR14: J1.34 J10.34 J21.34 J22.34 J23.34 J24.34 J25.34 J26.34 J27.34 J28.34 J29.34 J32.33 J210.34 J211.34 J212.34 | length 13692
  Top Layer w10: J32.33@1200,3400 1590,3400 1690,3300 J21.34@1700,3300 1709.39,3290.61 1729.39,3290.61 1764.53,3255.47 1855.47,3255.47 1900,3300 J22.34@2500,3300 2509.39,3290.61 2529.39,3290.61 2564.53,3255.47 3155.47,3255.47 3200,3300 J23.34@3300,3300 3309.39,3290.61 3329.39,3290.61 3364.53,3255.47 3955.47,3255.47 4000,3300 J24.34@4100,3300 4109.39,3290.61 4129.39,3290.61 4164.53,3255.47 4755.47,3255.47 4800,3300 J25.34@4900,3300 4909.39,3290.61 4929.39,3290.61 4964.53,3255.47 5555.47,3255.47 5600,3300 J26.34@5700,3300 5709.39,3290.61 5729.39,3290.61 5764.53,3255.47 6355.47,3255.47 6400,3300 J27.34@6500,3300 6509.39,3290.61 6529.39,3290.61 6564.53,3255.47 7155.47,3255.47 7200,3300 J28.34@7300,3300 7309.39,3290.61 7329.39,3290.61 7364.53,3255.47 7955.47,3255.47 8000,3300 J29.34@8100,3300 8109.39,3290.61 8129.39,3290.61 8164.53,3255.47 8755.47,3255.47 8800,3300 J210.34@8900,3300 8909.39,3290.61 8929.39,3290.61 8964.53,3255.47 9080.47,3255.47 9125,3300 J211.34@9700,3300 9709.39,3290.61 9729.39,3290.61 9764.53,3255.47 10353.6,3255.47 ; J10.34@1700,6200 1741,6241 1836,6241 1877,6200 J1.34@2500,6200 ; 10355.47,3255.47 10400,3300 J212.34@10500,3300
  Bottom Layer w10: J1.34@2500,6200 2550,6150 2625,6150 2800,5975 v1(2800,3255.47)
ADDR15: J1.36 J10.36 J21.36 J22.36 J23.36 J24.36 J25.36 J26.36 J27.36 J28.36 J29.36 J32.35 J210.36 J211.36 J212.36 | length 13702.4
  Top Layer w10: J32.35@1200,3500 1590,3500 1690,3400 J21.36@1700,3400 1709.39,3390.61 1729.39,3390.61 1764.53,3355.47 1855.47,3355.47 1900,3400 J22.36@2500,3400 2509.39,3390.61 2529.39,3390.61 2564.53,3355.47 3155.47,3355.47 3200,3400 J23.36@3300,3400 3309.39,3390.61 3329.39,3390.61 3364.53,3355.47 3955.47,3355.47 4000,3400 J24.36@4100,3400 4109.39,3390.61 4129.39,3390.61 4164.53,3355.47 4755.47,3355.47 4800,3400 J25.36@4900,3400 4909.39,3390.61 4929.39,3390.61 4964.53,3355.47 5555.47,3355.47 5600,3400 J26.36@5700,3400 5709.39,3390.61 5729.39,3390.61 5764.53,3355.47 6355.47,3355.47 6400,3400 J27.36@6500,3400 6509.39,3390.61 6529.39,3390.61 6564.53,3355.47 7155.47,3355.47 7200,3400 J28.36@7300,3400 7309.39,3390.61 7329.39,3390.61 7364.53,3355.47 7955.47,3355.47 8000,3400 J29.36@8100,3400 8109.39,3390.61 8129.39,3390.61 8164.53,3355.47 8755.47,3355.47 8800,3400 J210.36@8900,3400 8909.39,3390.61 8929.39,3390.61 8964.53,3355.47 9080.47,3355.47 9125,3400 J211.36@9700,3400 9709.39,3390.61 9729.39,3390.61 9764.53,3355.47 10353.6,3355.47 ; J10.36@1700,6300 1741,6341 1836,6341 1877,6300 J1.36@2500,6300 ; 10355.47,3355.47 10400,3400 J212.36@10500,3400
  Bottom Layer w10: J1.36@2500,6300 2550,6250 2625,6250 2825,6050 v1(2825,3355.47)
ADDR16: J1.38 J10.38 J21.38 J22.38 J23.38 J24.38 J25.38 J26.38 J27.38 J28.38 J29.38 J32.37 J210.38 J211.38 J212.38 | length 13714.6
  Top Layer w10: J32.37@1200,3600 1590,3600 1690,3500 J21.38@1700,3500 1709.39,3490.61 1729.39,3490.61 1764.53,3455.47 1869.07,3455.47 1913.6,3500 J22.38@2500,3500 2509.39,3490.61 2529.39,3490.61 2564.53,3455.47 3155.47,3455.47 3200,3500 J23.38@3300,3500 3309.39,3490.61 3329.39,3490.61 3364.53,3455.47 3955.47,3455.47 4000,3500 J24.38@4100,3500 4109.39,3490.61 4129.39,3490.61 4164.53,3455.47 4755.47,3455.47 4800,3500 J25.38@4900,3500 4909.39,3490.61 4929.39,3490.61 4964.53,3455.47 5555.47,3455.47 5600,3500 J26.38@5700,3500 5709.39,3490.61 5729.39,3490.61 5764.53,3455.47 6355.47,3455.47 6400,3500 J27.38@6500,3500 6509.39,3490.61 6529.39,3490.61 6564.53,3455.47 7155.47,3455.47 7200,3500 J28.38@7300,3500 7309.39,3490.61 7329.39,3490.61 7364.53,3455.47 7955.47,3455.47 8000,3500 J29.38@8100,3500 8109.39,3490.61 8129.39,3490.61 8164.53,3455.47 8755.47,3455.47 8800,3500 J210.38@8900,3500 8909.39,3490.61 8929.39,3490.61 8964.53,3455.47 9080.47,3455.47 9125,3500 J211.38@9700,3500 9709.39,3490.61 9729.39,3490.61 9764.53,3455.47 10355.47,3455.47 10400,3500 J212.38@10500,3500 ; J10.38@1700,6400 1741,6441 1836,6441 1877,6400 J1.38@2500,6400
  Bottom Layer w10: J1.38@2500,6400 2550,6350 2625,6350 2850,6125 v1(2850,3455.47)